# EAGLE board ethernet_switch_single (EAGLE 6.3)
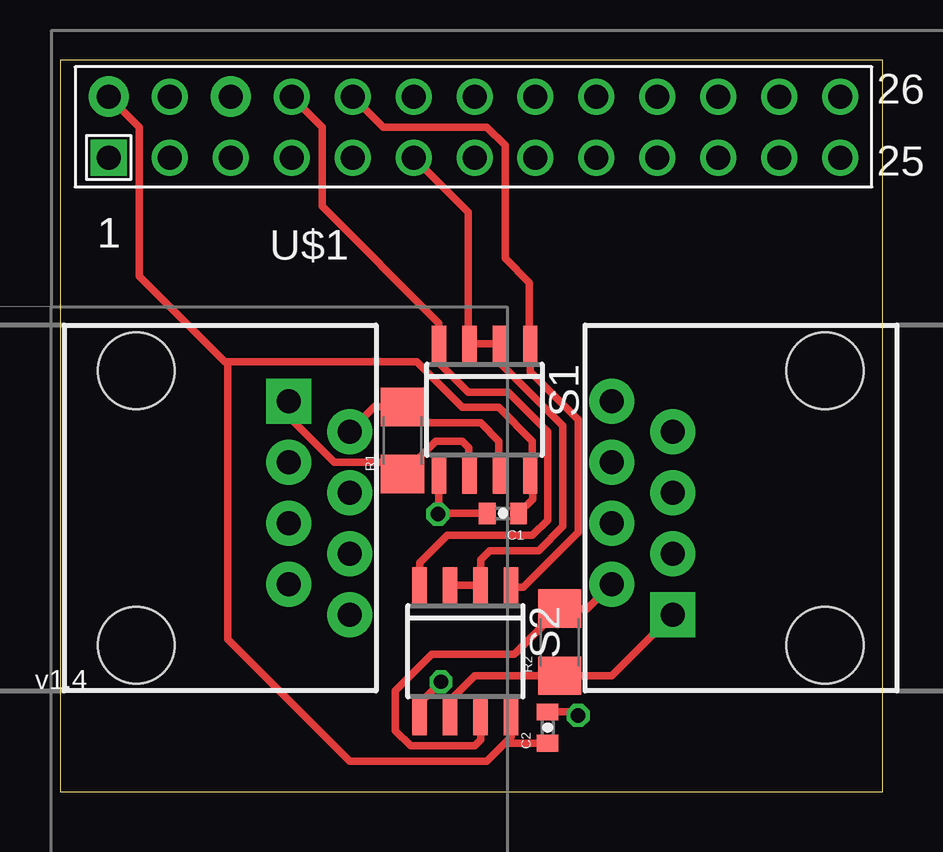
[diagram p0: board, top side]
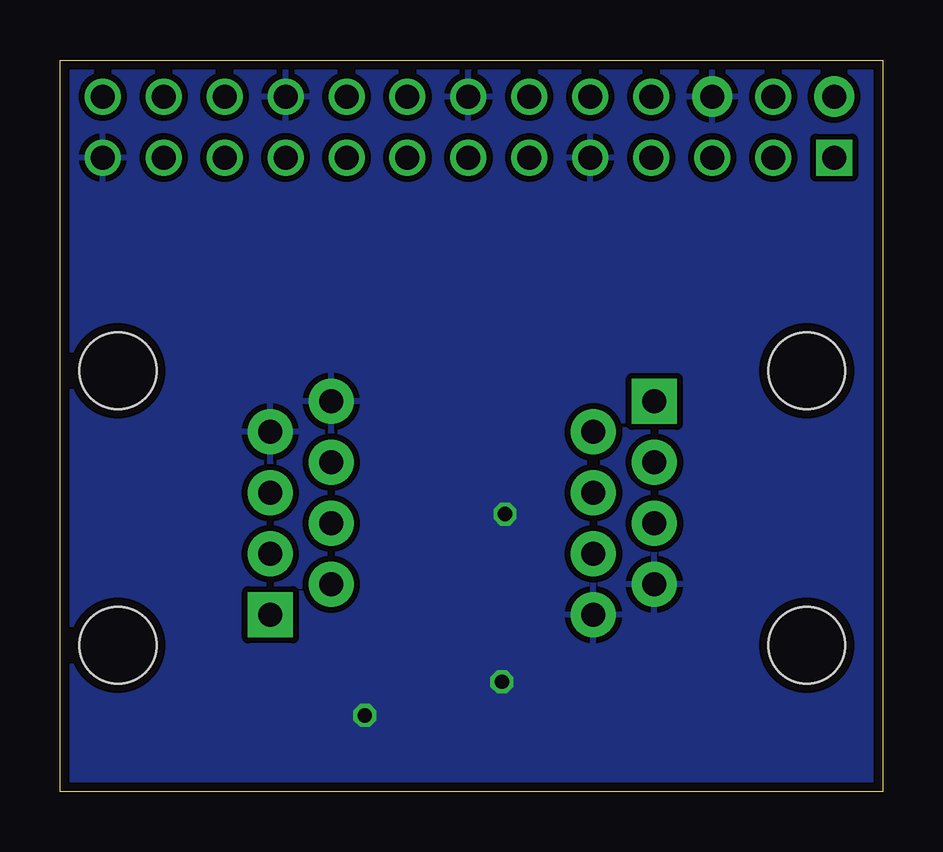
[diagram p1: board, bottom side, seen from below]

Size 34.29 x 30.48 mm. Coordinates in mm from the lower left corner, seen from the top.
Outline: 0,0 34.29,0 34.29,30.48 0,30.48 0,0
Copper layers (1*16): Top 0.0356mm / dielectric 1.5011mm / Bottom 0.0356mm
Design rules "LaenPCBOrder *": minimum track width 6mil, minimum drill 13mil, track to track 10mil, track to pad 6mil, pad to pad 6mil, via to via 6mil, smd to smd 6mil, copper to edge 15mil, drill to drill 6mil, minimum pad ring 7mil, minimum via ring 7mil, stop-mask expansion 4mil, vias tented up to drill 0mil, thermal gap 10mil
Net classes: 1 vcc: width 0.254 mm

## Footprints (pad centres in the part's own frame; a part is rotated, then mirrored left to right if it is on the bottom)
0402-CAP = smd 0.7 x 0.9: 1 -0.65,0; 2 0.65,0
RJ45-8 = drill 1 pad 1.88 square: 1 -4.445,6.35 | drill 1 pad 1.88: 2 -3.175,8.89; 3 -1.905,6.35; 4 -0.635,8.89; 5 0.635,6.35; 6 1.905,8.89; 7 3.175,6.35; 8 4.445,8.89 | hole 3.2: -5.715,0; 5.715,0
1206 = smd 1.6 x 1.8: 1 -1.4,0; 2 1.4,0
D_R-PDSO-G8 = smd 0.6 x 1.5: 1 -1.905,-2.75; 2 -0.635,-2.75; 3 0.635,-2.75; 4 1.905,-2.75; 5 1.905,2.75; 6 0.635,2.75; 7 -0.635,2.75; 8 -1.905,2.75
RASPBERRY-PI_REV1 = drill 1 square: 1 -41.91,21.59 | drill 1 pad 1.676: 2 -41.91,24.13; 6 -36.83,24.13 | drill 1: 3 -39.37,21.59; 4 -39.37,24.13; 5 -36.83,21.59; 7 -34.29,21.59; 8 -34.29,24.13; 9 -31.75,21.59; 10 -31.75,24.13; 11 -29.21,21.59; 12 -29.21,24.13; 13 -26.67,21.59; 14 -26.67,24.13; 15 -24.13,21.59; 16 -24.13,24.13; 17 -21.59,21.59; 18 -21.59,24.13; 19 -19.05,21.59; 20 -19.05,24.13; 21 -16.51,21.59; 22 -16.51,24.13; 23 -13.97,21.59; 24 -13.97,24.13; 25 -11.43,21.59; 26 -11.43,24.13

## Placement (x,y rotation side)
C1  .1uF  [0402-CAP]  18.45,11.59 180 top
C2  .1uF  [0402-CAP]  20.32,2.67 90 top
E1  RJ45-8PTH  [RJ45-8]  3.17,11.81 270 top
E2  RJ45-8PTH  [RJ45-8]  31.88,11.81 90 top
R1  100  [1206]  14.27,14.62 90 top
R2  100  [1206]  20.83,6.22 90 top
S1  75176B  [D_R-PDSO-G8]  17.69,15.9 180 top
S2  75176B  [D_R-PDSO-G8]  16.89,5.84 180 top
U$1  RASPBERRY-PI_REV1  [RASPBERRY-PI_REV1]  43.94,4.83 0 top

## Library data of the parts
C1 C2 = SparkFun-Capacitors
E1 E2 = SparkFun-Connectors
R1 R2 = SparkFun-Passives
S1 S2 = 751xx
U$1 = RaspberryPi

## Nets
DATA1+_1: E1.1 R1.1 S1.6
DATA1+_2: E2.1 R2.1 S2.6
DATA1-_1: E1.2 R1.2 S1.7
DATA1-_2: E2.2 R2.2 S2.7
DATA2+_1: E1.3
DATA2+_2: E2.3
DATA2-_1: E1.6
DATA2-_2: E2.6
GND: C1.2 C2.2 E1.7 E1.8 E2.7 E2.8 S1.5 S2.5 U$1.6 U$1.9 U$1.14 U$1.20 U$1.25
RE/DE: S1.2 S1.3 S2.2 S2.3 U$1.11
RXI: S1.1 S2.1 U$1.10
TXO: S1.4 S2.4 U$1.8
VCC: C1.1 C2.1 S1.8 S2.8 U$1.2

## Tracks (layer width: path | path; a pad name or v marks a point on that pad's centre or on a via)
DATA1+_1
  Top 0.305: 17.04,13.14 17.04,13.34 | 17.04,13.34 17.04,14.33 16.76,14.61 15.66,14.61 R1.1 13.78,13.72 11.43,13.72 9.53,15.62 E1.1 | S1.6 17.05,13.32 17.04,13.34
DATA1+_2
  Top 0.305: S2.6 16.26,3.81 17.27,4.83 R2.1 22.98,4.82 E2.1
DATA1-_1
  Top 0.305: S1.7 18.29,13.19 18.29,14.61 17.53,15.37 14.93,15.37 R1.2 13.1,16.02 E1.2
DATA1-_2
  Top 0.305: E2.2 21.97,7.62 R2.2 18.92,5.71 15.49,5.71 13.97,4.19 13.97,2.54 14.61,1.91 17.27,1.91 17.53,2.16 S2.7
GND  (via drill 0.6)
  Top 0.305: S1.5 15.79,11.59 v15.75,11.56 15.78,11.59 C1.2 | S2.5 14.99,3.68 v15.88,4.57 | C2.2 21.45,3.32 v21.59,3.17
  pour Bottom: 0,0 0,30.48 34.29,30.48 34.29,0
RE/DE
  Top 0.305: S2.3 S2.2 17.53,9.65 17.91,10.03 19.94,10.03 20.95,11.05 20.95,15.24 18.29,17.91 18.29,18.62 S1.2 S1.3 17.02,18.69 17.02,24.13 U$1.11
RXI
  Top 0.305: 19.68,19.18 19.68,18.74 S1.1 | S1.1 19.56,18.69 19.56,21.21 18.54,22.23 18.54,26.92 17.78,27.69 13.46,27.69 U$1.10 | S1.1 19.59,17.49 21.59,15.49 21.59,10.79 19.3,8.51 18.88,8.51 S2.1 18.88,8.21
TXO
  Top 0.305: S2.4 14.99,9.53 16.13,10.67 19.68,10.67 20.32,11.3 20.32,14.99 18.67,16.64 17.02,16.64 15.79,17.87 S1.4 15.79,19.52 10.92,24.38 10.92,27.69 U$1.8
VCC
  Top 0.305: 6.98,17.91 6.86,17.91 3.3,21.46 3.3,27.69 U$1.2 | 6.98,17.91 14.86,17.91 16.76,16 18.29,16 19.68,14.61 19.68,13.24 S1.8 19.69,13.25 19.69,12.18 C1.1 | S2.8 18.8,2.29 18.53,2.02 | 18.53,2.02 17.78,1.27 12.07,1.27 6.98,6.35 6.98,17.91 | C2.1 18.53,2.02

## Text on the board
tPlace: v1.4